# Altium PCB Coil_Driver_Rev_A.PcbDoc (part 2 of 2)
Units mm, origin at the board's own origin, x right, y up, seen from the top; angles counter-clockwise.
Board outline 103.83 x 48.83 mm, 4 copper layers (Top Layer, GND, Power, Bottom Layer), stack 1.57 mm thick; 192 components, 105 nets, 467 pads, 152 vias.
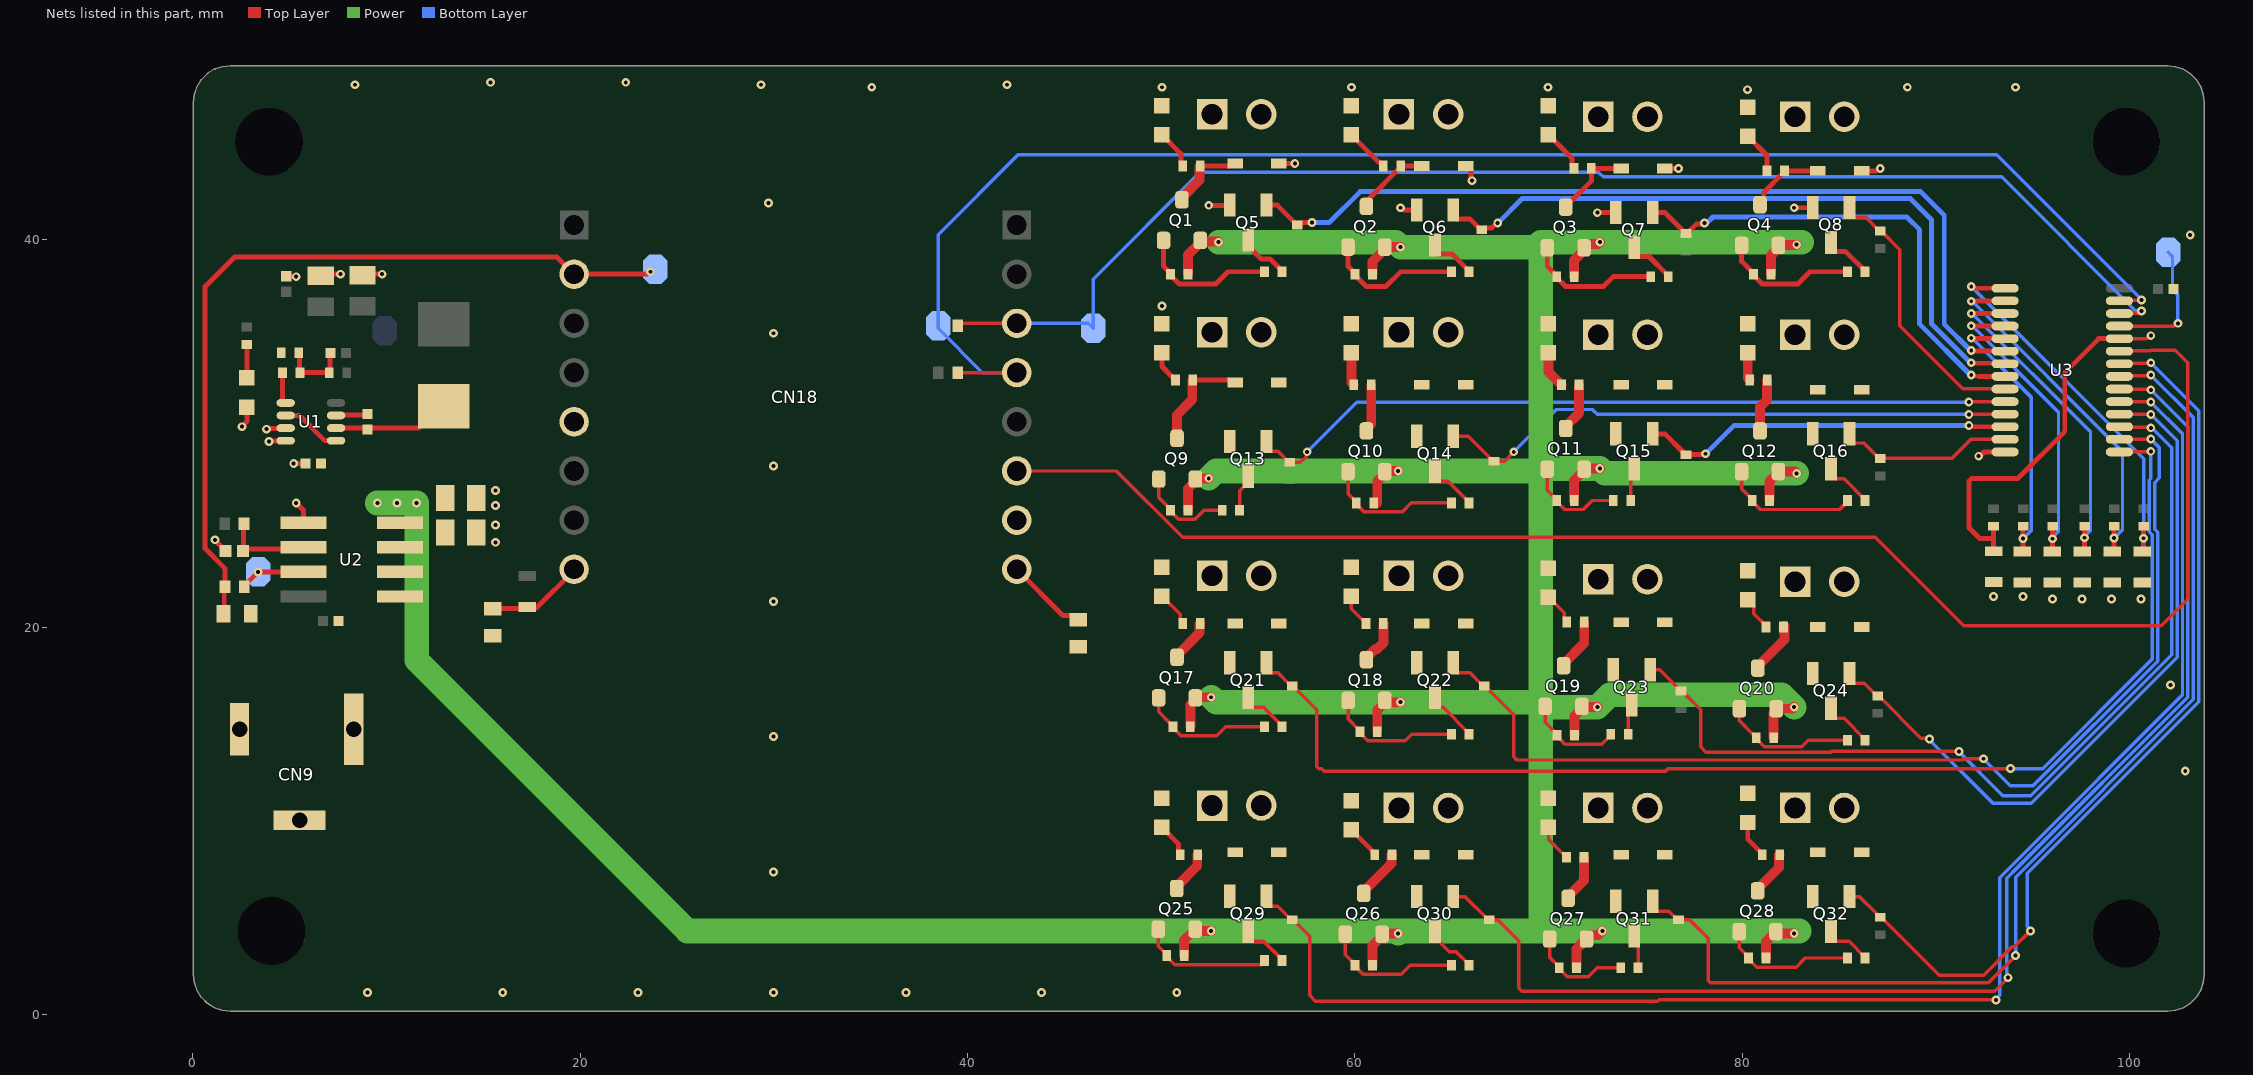
[diagram p4: the nets of this part, all layers, seen from the top]

## Via types
v1: diameter 0.45, hole 0.203, Top Layer to Bottom Layer, 91 vias
v2: diameter 0.457, hole 0.203, Top Layer to Bottom Layer, 60 vias
v3: diameter 0.457, hole 0.203, Top Layer to Bottom Layer, tented both sides, 1 vias

## Nets (pads, with @x,y where several pads share a name; then routed paths per layer and width w, separated by ;. In a path a pad name is that pad's centre, name@x,y a point inside that pad or via, vN(x,y) a via of type N, cw(c..) or ccw(c..) an arc to the next point about the centre after c; other vN are vias at no path point) (continued)
12V: C2.1 C3.1 C4.1 Q1.S Q2.S Q3.S Q4.S Q9.S Q10.S Q11.S Q12.S Q17.S Q18.S Q19.S Q20.S Q25.S Q26.S Q27.S Q28.S R1.1 R2.1 R3.1 R4.1 R17.1 R18.1 R19.1 R20.1 R37.1 R38.1 R39.1 R40.1 R53.1 R54.1 R55.1 R56.1 U1.2 U1.5 U2.3 U2.4 | length 259.5
  Top Layer w0.254: U1.2@4.796,30.932 5.517,30.932 6.812,29.637 7.391,29.637 U1.5@7.396,29.632
  Top Layer w0.508: R53.1@51.181,3.048 51.181,3.842 51.554,4.215 51.654,4.215 51.75,4.311 Q25.S@51.75,4.411 51.843,4.318 v1(52.578,4.318) ; R17.1@51.377,26.035 51.377,27.164 51.765,27.552 Q9.S@51.765,27.652 51.799,27.686 v1(52.451,27.686) ; R1.1@51.377,38.227 51.377,39.229 52.019,39.871 Q1.S@52.019,39.971 52.074,39.916 52.921,39.916 v1(52.959,39.878) ; R37.1@51.504,14.859 51.504,15.988 51.765,16.249 Q17.S@51.765,16.349 51.799,16.383 v1(52.578,16.383) ; R54.1@60.902,2.54 60.902,3.577 61.286,3.961 61.306,3.961 61.402,4.057 Q26.S@61.402,4.157 61.436,4.191 v1(62.23,4.191) ; R2.1@60.902,38.227 60.902,38.883 61.544,39.525 Q2.S@61.544,39.624 v1(62.357,39.624) ; R38.1@61.156,14.605 61.156,15.734 61.544,16.122 Q18.S@61.544,16.222 61.637,16.129 v1(62.357,16.129) ; R18.1@61.156,26.416 61.156,27.545 61.544,27.933 Q10.S@61.544,28.033 61.578,28.067 v1(62.23,28.067) ; R19.1@71.316,26.543 71.316,27.58 71.7,27.964 71.735,27.964 71.831,28.06 Q11.S@71.831,28.16 71.865,28.194 v1(72.644,28.194) ; R3.1@71.316,38.1 71.316,38.949 71.831,39.464 Q3.S@71.831,39.59 71.831,39.69 71.927,39.786 72.552,39.786 v1(72.644,39.878) ; R39.1@71.332,14.426 71.332,15.423 71.72,15.811 Q19.S@71.72,15.911 71.755,15.875 v1(72.517,15.875) ; R55.1@71.443,2.413 71.443,3.388 71.762,3.707 71.862,3.707 71.958,3.803 Q27.S@71.958,3.903 71.958,4.003 72.054,4.099 72.552,4.099 v1(72.771,4.318) ; R56.1@81.222,2.921 81.222,3.769 81.541,4.088 81.641,4.088 81.737,4.184 Q28.S@81.737,4.284 81.83,4.191 v1(82.677,4.191) ; R20.1@81.407,26.543 81.407,27.539 81.705,27.837 81.768,27.837 81.864,27.933 Q12.S@81.864,28.033 82.711,28.033 v1(82.804,27.94) ; R4.1@81.476,38.227 81.476,39.203 81.864,39.591 Q4.S@81.864,39.717 81.881,39.734 82.787,39.734 v1(82.804,39.751) ; R40.1@81.619,14.299 81.619,15.555 81.753,15.689 Q20.S@81.753,15.789 82.591,15.789 v1(82.677,15.875)
  Power w1.27: v2(9.525,26.416) v2(10.541,26.416) v2(11.557,26.416) 11.557,18.288 25.527,4.318 v1(52.578,4.318) v1@62.357,4.318 ; v1(52.451,27.686) 52.832,28.067 v1(62.23,28.067) 69.596,28.067 ; v1(52.578,16.383) 52.832,16.129 v1(62.357,16.129) 69.596,16.129 ; v1(52.959,39.878) 62.103,39.878 v1(62.357,39.624) 69.596,39.624 ; v1(62.23,4.191) v1@62.357,4.318 ; v1(82.677,15.875) 82.042,16.51 73.152,16.51 v1(72.517,15.875) 69.596,15.875 ; v1(82.804,27.94) 72.898,27.94 v1(72.644,28.194) 69.596,28.194 ; 82.931,4.318 v1(72.771,4.318) 69.469,4.318 ; 83.058,39.878 v1(72.644,39.878) 69.596,39.878 69.596,39.624 ; v1@62.357,4.318 69.469,4.318 ; 69.469,4.318 69.596,4.445 69.596,15.875 ; 69.596,15.875 69.596,16.129 ; 69.596,16.129 69.596,28.067 ; 69.596,28.067 69.596,28.194 ; 69.596,28.194 69.596,39.624
BTN_OLED: CN18.5
COIL1: Q5.1 R13.2 U3.6 | length 45.8
  Top Layer w0.254: Q5.1@55.433,41.794 55.996,41.794 56.875,40.915 R13.2@56.875,40.865 ; R13.2@57.023,40.767 57.121,40.865 57.291,40.865 57.32,40.894 v1(57.785,40.894) ; v1(91.821,34.29) 91.842,34.269 93.55,34.269 U3.6@93.57,34.249
  Bottom Layer w0.254: v1(57.785,40.894) 58.674,40.894 60.271,42.491 89.208,42.491 90.424,41.275 90.424,35.645 91.779,34.29 v1(91.821,34.29)
COIL2: Q6.1 R14.2 U3.7 | length 36.4
  Top Layer w0.254: Q6.1@65.085,41.54 65.085,41.24 65.258,41.067 65.955,41.067 66.498,40.524 R14.2@66.548,40.524 66.646,40.622 67.071,40.622 67.314,40.865 v1(67.367,40.865) ; v1(91.821,33.655) 91.849,33.627 93.542,33.627 U3.7@93.57,33.599
  Bottom Layer w0.254: v1(67.367,40.865) 68.637,42.135 88.675,42.135 89.768,41.042 89.768,35.666 91.779,33.655 v1(91.821,33.655)
COIL3: Q7.1 R15.2 U3.8 | length 25
  Top Layer w0.178: v1@91.903,32.949 92.202,32.949
  Top Layer w0.254: Q7.1@75.372,41.413 76.004,41.413 76.941,40.476 R15.2@76.941,40.426 ; R15.2@77.089,40.328 77.139,40.328 77.638,40.827 78.011,40.827 v1(78.048,40.865) ; 92.202,32.949 U3.8@93.57,32.949
  Bottom Layer w0.254: v1(78.048,40.865) 78.086,40.903 78.213,40.903 78.487,41.177 88.49,41.177 89.154,40.513 89.154,35.645 91.779,33.02 v1(91.821,33.02)
COIL4: Q8.1 R16.2 U3.9 | length 14.4
  Top Layer w0.178: Q8.1@85.532,41.667 85.532,41.367 85.743,41.156 86.371,41.156 87.072,40.455 R16.2@87.122,40.455 87.172,40.455 88.13,39.497 88.138,39.497 88.138,35.56 91.385,32.313 93.556,32.313 U3.9@93.57,32.299
COIL5: Q13.1 R29.2 U3.10 | length 40.2
  Top Layer w0.178: Q13.1@55.433,29.591 55.433,29.291 55.644,29.08 56.029,29.08 56.592,28.517 R29.2@56.642,28.517 57.184,28.517 57.479,28.812 57.479,29.002 v1(57.531,29.054) ; v1(91.694,31.623) 91.707,31.636 93.557,31.636 U3.10@93.57,31.649
  Bottom Layer w0.178: v1(57.531,29.054) 60.1,31.623 v1(91.694,31.623)
COIL6: Q14.1 R30.2 U3.11 | length 30.2
  Top Layer w0.178: Q14.1@65.085,29.856 65.852,29.856 67.133,28.575 R30.2@67.183,28.575 67.725,28.575 68.199,29.049 v1(68.199,29.054) ; v1(91.694,30.988) 91.699,30.993 93.564,30.993 U3.11@93.57,30.999
  Bottom Layer w0.178: v1(68.199,29.054) 70.387,31.242 72.263,31.242 72.517,30.988 v1(91.694,30.988)
COIL7: Q15.1 R31.2 U3.12 | length 19.1
  Top Layer w0.254: Q15.1@75.372,29.983 76.004,29.983 76.941,29.046 R31.2@76.941,28.996 ; R31.2@77.089,28.898 77.118,28.927 78.076,28.927 v1(78.105,28.956) ; v1(91.694,30.411) 91.747,30.411 91.809,30.349 U3.12@93.57,30.349
  Bottom Layer w0.254: v1(78.105,28.956) 79.56,30.411 v1(91.694,30.411)
COIL8: Q16.1 R32.2 U3.13 | length 9.2
  Top Layer w0.178: Q16.1@85.532,29.983 85.532,29.683 85.705,29.51 86.275,29.51 87.072,28.713 R32.2@87.122,28.713 90.816,28.713 91.821,29.718 91.83,29.709 93.561,29.709 U3.13@93.57,29.699
COIL9: Q21.1 R49.2 U3.15 | length 64.8
  Top Layer w0.178: Q21.1@55.433,18.172 55.433,17.872 55.644,17.661 56.018,17.661 56.719,16.96 R49.2@56.769,16.96 56.819,16.96 58.039,15.74 58.039,12.802 58.143,12.697 58.29,12.697 58.415,12.573 76.033,12.573 76.16,12.7 v2(93.853,12.7) ; U3.15@99.47,29.049 99.487,29.066 101.075,29.066 v1(101.092,29.083)
  Bottom Layer w0.178: v2(93.853,12.7) 95.504,12.7 101.163,18.359 101.163,24.778 101.007,24.934 101.007,27.584 101.092,27.67 v1(101.092,29.083)
COIL10: Q22.1 R50.2 U3.16 | length 56.6
  Top Layer w0.178: Q22.1@65.085,18.172 65.085,17.872 65.296,17.661 65.924,17.661 66.625,16.96 R50.2@66.675,16.96 66.725,16.96 68.199,15.486 68.199,13.312 68.367,13.144 91.37,13.144 91.434,13.208 v2(92.456,13.208) ; U3.16@99.47,29.699 99.48,29.709 101.083,29.709 v1(101.092,29.718)
  Bottom Layer w0.178: v2(92.456,13.208) 92.456,13.185 93.83,11.811 95.01,11.811 101.443,18.244 101.443,24.893 101.286,25.05 101.286,27.469 101.533,27.715 101.533,29.277 v1(101.092,29.718)
COIL11: Q23.1 R51.2 U3.17 | length 47.7
  Top Layer w0.178: Q23.1@75.245,17.802 75.739,17.802 76.649,16.892 76.649,16.842 76.785,16.706 R51.2@76.835,16.706 76.885,16.706 77.851,15.74 77.851,13.82 78.117,13.554 84.57,13.554 84.605,13.589 v2(91.186,13.589) ; U3.17@99.47,30.349 99.497,30.322 101.065,30.322 v1(101.092,30.295)
  Bottom Layer w0.178: v2(91.186,13.589) 91.186,13.566 93.449,11.303 94.897,11.303 102.168,18.574 102.168,29.266 101.139,30.295 v1(101.092,30.295)
COIL12: Q24.1 R52.2 U3.18 | length 37.7
  Top Layer w0.178: Q24.1@85.532,17.612 85.532,17.312 85.743,17.101 86.296,17.101 86.945,16.452 R52.2@86.995,16.452 87.045,16.452 89.22,14.277 89.609,14.277 v2(89.662,14.224) ; U3.18@99.47,30.999 99.476,30.993 101.087,30.993 v1(101.092,30.988)
  Bottom Layer w0.178: v2(89.662,14.224) 89.662,14.201 92.941,10.922 94.911,10.922 102.447,18.458 102.447,29.633 v1(101.092,30.988)
COIL13: Q29.1 R65.2 U3.19 | length 79.1
  Top Layer w0.178: Q29.1@55.433,6.107 55.433,5.807 55.644,5.596 56.018,5.596 56.719,4.895 R65.2@56.769,4.895 56.819,4.895 57.658,4.056 57.658,0.993 57.953,0.699 75.643,0.699 75.706,0.762 v2(93.091,0.762) ; U3.19@99.47,31.649 99.483,31.636 101.079,31.636 v1(101.092,31.623)
  Bottom Layer w0.178: v2(93.091,0.762) 93.091,0.815 93.281,1.006 93.281,7.063 94.036,7.818 102.727,16.508 102.727,29.988 v1(101.092,31.623)
COIL14: Q30.1 R66.2 U3.20 | length 69.1
  Top Layer w0.178: Q30.1@65.085,6.096 65.678,6.096 66.879,4.895 R66.2@66.929,4.895 67.368,4.895 68.453,3.81 68.453,1.374 68.621,1.206 93.027,1.206 v2(93.726,1.905) ; U3.20@99.47,32.299 99.491,32.279 101.071,32.279 v1(101.092,32.258)
  Bottom Layer w0.178: v2(93.726,1.905) 93.673,1.958 93.673,2.139 93.662,2.149 93.662,7.048 94.234,7.62 103.006,16.392 103.006,30.344 v1(101.092,32.258)
COIL15: Q31.1 R67.2 U3.21 | length 58.8
  Top Layer w0.178: Q31.1@75.372,5.853 75.372,5.553 75.583,5.342 76.211,5.342 76.658,4.895 R67.2@76.708,4.895 77.274,4.895 78.232,3.937 78.232,1.755 78.336,1.651 92.71,1.651 v2(94.107,3.048) ; U3.21@99.47,32.949 99.506,32.984 101.056,32.984 v1(101.092,33.02)
  Bottom Layer w0.178: v2(94.107,3.048) 94.107,7.098 103.286,16.276 103.286,30.826 v1(101.092,33.02)
COIL16: Q32.1 R68.2 U3.22 | length 47.7
  Top Layer w0.178: Q32.1@85.532,6.096 86.048,6.096 86.936,5.208 86.936,5.158 87.072,5.022 R68.2@87.122,5.022 87.172,5.022 90.162,2.032 92.462,2.032 93.923,3.492 94.051,3.492 v2(94.876,4.318) ; U3.22@99.47,33.599 99.498,33.627 101.064,33.627 v1(101.092,33.655)
  Bottom Layer w0.178: v2(94.876,4.318) 94.876,4.394 94.711,4.559 94.711,7.307 103.565,16.161 103.565,31.182 v1(101.092,33.655)
Coil_EN: CN18.11 U3.23 | length 80.4
  Top Layer w0.178: CN18.11@42.545,28.067 47.676,28.067 51.105,24.638 86.868,24.638 91.44,20.066 101.623,20.066 102.997,21.44 102.997,33.655 102.362,34.29 101.092,34.29 101.071,34.269 99.491,34.269 U3.23@99.47,34.249
CUR_SYS_ANA: C14.1 CN18.2 R72.1 TP2.1 | length 41.4
  Top Layer w0.254: C14.1@1.623,20.665 1.623,22.062 R72.1@1.659,22.098 1.659,23.038 0.635,24.062 0.635,37.592 2.159,39.116 18.796,39.116 CN18.2@19.685,38.227 23.442,38.227 23.569,38.354 v1(23.622,38.354)
GND: C2.2 C3.2 C4.2 C6.2 C7.2 C10.2 C11.2 C12.2 C13.2 C14.2 C15.2 C16.2 CN1.2 CN2.2 CN3.2 CN4.2 CN5.2 CN6.2 CN7.2 CN8.2 CN9.2 CN9.3 CN10.2 CN11.2 CN12.2 CN13.2 CN14.2 CN15.2 CN16.2 CN17.2 CN18.10 D1.2 D2.2 D3.2 D4.2 D5.2 D6.2 D7.2 D8.2 D9.2 D10.2 D11.2 D12.2 D13.2 D14.2 D15.2 D16.2 J1.1 J2.1 J3.1 J4.1 J5.1 J6.1 LED1.2 LED2.2 LED3.2 LED4.2 LED5.2 LED6.2 LED7.2 LED8.2 LED9.2 LED10.2 LED11.2 LED12.2 LED13.2 LED14.2 LED15.2 LED16.2 LED17.2 Q5.2 Q6.2 Q7.2 Q8.2 Q13.2 Q14.2 Q15.2 Q16.2 Q21.2 Q22.2 Q23.2 Q24.2 Q29.2 Q30.2 Q31.2 Q32.2 R36.2 U1.3 U1.4 U2.5 U3.14 | length 17.1
  Top Layer w0.254: v1(1.143,24.511) 1.143,24.497 C13.2@1.693,23.947 ; v1(2.54,30.353) 2.794,30.607 LED9.2@2.794,31.369 ; v1(3.81,30.226) 3.838,30.254 4.768,30.254 U1.3@4.796,30.282 ; v1(3.937,29.591) 3.958,29.612 4.775,29.612 U1.4@4.796,29.632 ; C10.2@4.826,38.119 4.836,38.109 5.325,38.109 v1(5.334,38.1) ; v1(5.207,28.448) C4.2@5.823,28.448 ; v1(5.334,26.416) 5.715,26.035 U2.5@5.715,25.4 ; C6.2@6.604,38.138 6.693,38.227 v1(7.62,38.227) ; C7.2@8.763,38.176 8.814,38.227 v1(9.779,38.227) ; v1(52.451,41.783) 53.522,41.783 Q5.2@53.533,41.794 ; D1.2@56.058,43.942 v1(56.896,43.942) ; v1(62.357,41.656) 62.41,41.656 62.526,41.54 Q6.2@63.185,41.54 ; D2.2@65.71,43.815 65.86,43.815 65.983,43.692 65.983,43.163 66.04,43.106 v1(66.04,43.053) ; v1(72.517,41.402) 73.461,41.402 Q7.2@73.472,41.413 ; D3.2@75.997,43.688 v1(76.708,43.688) ; v1(82.677,41.656) 83.621,41.656 Q8.2@83.632,41.667 ; D4.2@86.157,43.561 86.942,43.561 87.069,43.688 v1(87.122,43.688) ; v1(92.202,28.829) 92.255,28.829 92.475,29.049 U3.14@93.57,29.049
  other v2: 9.017,1.143 16.002,1.143 22.987,1.143 29.972,1.143 36.83,1.143 43.815,1.143 50.8,1.143 102.87,12.573 29.972,14.351 102.108,17.018 29.972,21.336 96.012,21.463 97.536,21.463 99.06,21.463 100.584,21.463 92.964,21.59 94.488,21.59 15.621,24.384 15.621,25.273 15.621,26.289 15.621,27.051 29.972,28.321 29.972,35.179 50.038,36.576 103.124,40.259 29.718,41.91 80.264,47.752 35.052,47.879 50.038,47.879 59.817,47.879 69.977,47.879 88.519,47.879 94.107,47.879 8.382,48.006 29.337,48.006 42.037,48.006 15.367,48.133 22.352,48.133
  other v3: 29.972,7.366
NetC1_1: C1.1 U1.7 | length 1.7
  Top Layer w0.254: U1.7@7.396,30.932 7.424,30.96 8.97,30.96 C1.1@9.017,31.007
NetC1_2: C1.2 L1.1 U1.6 | length 6
  Top Layer w0.254: U1.6@7.396,30.282 9.017,30.282 11.658,30.282 12.779,31.403 L1.1@12.954,31.403
NetC5_2: C5.2 R33.2 R34.2 R36.1 | length 3.6
  Top Layer w0.254: R36.1@5.472,34.163 5.501,34.134 5.501,33.176 R34.2@5.53,33.147 R33.2@7.043,33.147 7.077,33.182 7.077,34.128 C5.2@7.112,34.163
NetC11_1: C11.1 CN18.8 J7.2 | length 5.1
  Top Layer w0.254: C11.1@15.494,20.958 15.509,20.973 17.511,20.973 17.526,20.987 17.722,20.987 19.685,22.95 CN18.8@19.685,22.987
NetC13_1: C13.1 R71.2 U2.6 | length 4.6
  Top Layer w0.254: C13.1@2.593,23.947 C13.1@2.618,23.972 ; R71.2@2.643,25.344 2.618,25.319 C13.1@2.618,23.972 ; U2.6@5.715,24.13 5.624,24.039 2.685,24.039 C13.1@2.618,23.972
NetCN1_1: CN1.1 D1.1 Q1.D R9.1 | length 4
  Top Layer w0.254: R9.1@52.012,43.815 53.531,43.815 53.658,43.942 D1.1@53.808,43.942
  Top Layer w0.508: Q1.D@51.069,42.071 51.069,42.171 51.983,43.085 51.983,43.794 52.004,43.815 R9.1@52.012,43.815
NetCN2_1: CN2.1 D2.1 Q2.D R10.1 | length 3.9
  Top Layer w0.254: Q2.D@60.594,41.724 60.787,41.917 60.787,42.189 62.363,43.765 R10.1@62.363,43.815 D2.1@63.46,43.815
NetCN3_1: CN3.1 D3.1 Q3.D R11.1 | length 4.1
  Top Layer w0.254: Q3.D@70.881,41.69 70.881,41.764 71.1,41.983 71.156,41.983 72.205,43.032 R11.1@72.205,43.688 D3.1@73.747,43.688
NetCN4_1: CN4.1 D4.1 Q4.D R12.1 | length 4
  Top Layer w0.254: Q4.D@80.914,41.817 81.107,42.01 81.107,42.443 82.175,43.511 R12.1@82.175,43.561 D4.1@83.907,43.561
NetCN5_1: CN5.1 D5.1 Q9.D R25.1 | length 5.6
  Top Layer w0.254: R25.1@51.631,32.766 53.531,32.766 53.658,32.639 D5.1@53.808,32.639
  Top Layer w0.508: Q9.D@50.815,29.752 50.815,30.964 51.602,31.751 51.602,32.745 51.623,32.766 R25.1@51.631,32.766
NetCN6_1: CN6.1 D6.1 Q10.D R26.1 | length 2.5
  Top Layer w0.508: Q10.D@60.594,30.133 60.594,30.233 60.839,30.478 R26.1@60.839,32.512
NetCN7_1: CN7.1 D7.1 Q11.D R27.1 | length 2.5
  Top Layer w0.508: Q11.D@70.881,30.26 70.881,30.36 71.57,31.049 R27.1@71.57,32.512
NetCN8_1: CN8.1 D8.1 Q12.D R28.1 | length 2.8
  Top Layer w0.508: Q12.D@80.914,30.133 80.914,31.366 81.277,31.729 81.277,32.757 R28.1@81.286,32.766
NetCN9_1: CN9.1 U2.1 U2.2
NetCN10_1: CN10.1 D9.1 Q17.D R45.1 | length 2.2
  Top Layer w0.508: Q17.D@50.815,18.449 50.815,18.549 51.983,19.717 51.983,20.172 52.004,20.193 R45.1@52.012,20.193
NetCN11_1: CN11.1 D10.1 Q18.D R46.1 | length 2.3
  Top Layer w0.508: Q18.D@60.594,18.322 60.594,18.422 61.049,18.877 61.149,18.877 61.468,19.196 R46.1@61.468,20.193
NetCN12_1: CN12.1 D11.1 Q19.D R47.1 | length 2.7
  Top Layer w0.508: Q19.D@70.77,18.011 70.77,18.111 71.84,19.181 R47.1@71.84,20.268
NetCN13_1: CN13.1 D12.1 Q20.D R48.1 | length 2.8
  Top Layer w0.508: Q20.D@80.803,17.889 80.803,17.989 82.178,19.364 82.178,20.065 R48.1@82.127,20.014
NetCN14_1: CN14.1 D13.1 Q25.D R61.1 | length 2.2
  Top Layer w0.508: Q25.D@50.8,6.511 50.8,6.611 51.856,7.667 51.856,8.234 51.877,8.255 R61.1@51.885,8.255
NetCN15_1: CN15.1 D14.1 Q26.D R62.1 | length 2.6
  Top Layer w0.508: Q26.D@60.452,6.257 60.452,6.357 61.889,7.794 61.889,8.234 61.91,8.255 R62.1@61.918,8.255
NetCN16_1: CN16.1 D15.1 Q27.D R63.1 | length 2.5
  Top Layer w0.508: Q27.D@71.008,6.003 71.008,6.103 71.824,6.919 R63.1@71.824,8.128
NetCN17_1: CN17.1 D16.1 Q28.D R64.1 | length 2.3
  Top Layer w0.508: Q28.D@80.787,6.384 80.787,6.484 81.897,7.594 81.897,8.234 81.918,8.255 R64.1@81.926,8.255
NetJ1_2: J1.2 R73.2 U3.24 | length 19.5
  Top Layer w0.178: U3.24@99.47,34.899 100.865,34.899 101.018,35.052 v1(101.092,35.052)
  Top Layer w0.254: J1.2@92.972,23.923 92.972,24.571 ; R73.2@92.972,25.219 92.972,24.571 ; U3.24@99.47,34.899 98.399,34.899 96.647,33.147 96.647,30.099 94.234,27.686 91.843,27.686 91.694,27.537 91.694,25.146 92.269,24.571 92.972,24.571
NetJ2_2: J2.2 R74.2 U3.5 | length 14.9
  Top Layer w0.254: v1(91.821,34.925) 91.834,34.912 93.557,34.912 U3.5@93.57,34.899 ; J2.2@94.463,23.908 94.496,23.941 v2(94.496,24.58) R74.2@94.496,25.219
  Bottom Layer w0.178: v1(91.821,34.925) 91.863,34.925 94.929,31.86 94.929,25.013 v2(94.496,24.58)
NetJ3_2: J3.2 R75.2 U3.4 | length 16.1
  Top Layer w0.254: v1(91.821,35.56) 91.827,35.554 93.565,35.554 U3.4@93.57,35.549 ; J3.2@96.012,23.908 96.02,23.916 v2(96.02,24.567) R75.2@96.02,25.219
  Bottom Layer w0.178: v1(91.821,35.56) 91.863,35.56 96.326,31.098 96.326,24.949 96.02,24.643 v2(96.02,24.567)
NetJ4_2: J4.2 R76.2 U3.3 | length 17.4
  Top Layer w0.254: v1(91.821,36.195) 91.823,36.197 93.568,36.197 U3.3@93.57,36.199 ; J4.2@97.561,23.908 97.671,24.018 v2(97.671,24.618) R76.2@97.671,25.219
  Bottom Layer w0.178: v1(91.821,36.195) 91.863,36.195 97.977,30.082 97.977,25 97.671,24.694 v2(97.671,24.618)
NetJ5_2: J5.2 R77.2 U3.2 | length 18.8
  Top Layer w0.254: v1(91.821,36.83) 91.83,36.839 93.561,36.839 U3.2@93.57,36.849 ; J5.2@99.11,23.908 99.195,23.993 v2(99.195,24.606) R77.2@99.195,25.219
  Bottom Layer w0.178: v1(91.821,36.83) 91.863,36.83 99.628,29.066 99.628,25.039 v2(99.195,24.606)
NetJ6_2: J6.2 R78.2 U3.1 | length 19.8
  Top Layer w0.254: v1(91.821,37.592) 91.874,37.592 91.967,37.499 U3.1@93.57,37.499 ; J6.2@100.659,23.908 100.719,23.968 v2(100.719,24.594) R78.2@100.719,25.219
  Bottom Layer w0.178: v1(91.821,37.592) 100.719,28.694 v2(100.719,24.594)
NetLED1_1: LED1.1 R9.2 | length 2.1
  Top Layer w0.254: LED1.1@50.038,45.426 51.014,44.45 51.014,43.913 R9.2@51.112,43.815
NetLED2_1: LED2.1 R10.2 | length 2.3
  Top Layer w0.254: LED2.1@59.817,45.426 61.28,43.963 61.365,43.963 61.463,43.865 R10.2@61.463,43.815
NetLED3_1: LED3.1 R11.2 | length 2.3
  Top Layer w0.254: LED3.1@69.993,45.426 71.207,44.212 71.207,43.786 R11.2@71.305,43.688
NetLED4_1: LED4.1 R12.2 | length 2.2
  Top Layer w0.254: LED4.1@80.28,45.351 81.275,44.356 R12.2@81.275,43.561
NetLED5_1: LED5.1 R25.2 | length 1.7
  Top Layer w0.254: LED5.1@50.038,34.175 50.038,33.459 50.583,32.914 50.633,32.914 50.731,32.816 R25.2@50.731,32.766
NetLED6_1: LED6.1 R26.2 | length 1.7
  Top Layer w0.508: LED6.1@59.817,34.175 59.817,32.626 59.931,32.512 R26.2@59.939,32.512
NetLED7_1: LED7.1 R27.2 | length 1.9
  Top Layer w0.508: LED7.1@69.993,34.175 69.993,33.181 70.662,32.512 R27.2@70.67,32.512
NetLED8_1: LED8.1 R28.2 | length 1.5
  Top Layer w0.508: LED8.1@80.28,34.175 80.28,32.864 80.378,32.766 R28.2@80.386,32.766
NetLED9_1: LED9.1 R35.2 | length 1.7
  Top Layer w0.254: LED9.1@2.794,32.869 R35.2@2.794,34.602
NetLED10_1: LED10.1 R45.2 | length 1.9
  Top Layer w0.178: LED10.1@50.038,21.602 50.976,20.664 50.976,20.329 R45.2@51.112,20.193
NetLED11_1: LED11.1 R46.2 | length 1.7
  Top Layer w0.178: LED11.1@59.817,21.602 59.817,20.944 60.382,20.379 60.432,20.379 60.568,20.243 R46.2@60.568,20.193
NetLED12_1: LED12.1 R47.2 | length 1.7
  Top Layer w0.178: LED12.1@69.993,21.55 70.804,20.739 70.804,20.404 R47.2@70.94,20.268
NetLED13_1: LED13.1 R48.2 | length 1.8
  Top Layer w0.178: LED13.1@80.28,21.423 80.591,21.112 80.591,20.7 81.227,20.064 R48.2@81.227,20.014
NetLED14_1: LED14.1 R61.2 | length 1.8
  Top Layer w0.254: LED14.1@50.038,9.664 50.887,8.815 50.887,8.353 R61.2@50.985,8.255
NetLED15_1: LED15.1 R62.2 | length 1.8
  Top Layer w0.254: LED15.1@59.817,9.537 60.92,8.434 60.92,8.353 R62.2@61.018,8.255
NetLED16_1: LED16.1 R63.2 | length 2
  Top Layer w0.178: LED16.1@69.993,9.664 69.993,9.059 70.738,8.314 70.788,8.314 70.924,8.178 R63.2@70.924,8.128
NetLED17_1: LED17.1 R64.2 | length 2
  Top Layer w0.254: LED17.1@80.28,9.918 80.28,9.051 81.026,8.305 R64.2@81.026,8.255
NetQ1_G: Q1.G R1.2 R5.1 | length 7.2
  Top Layer w0.254: Q1.G@50.119,39.971 50.119,38.635 50.477,38.277 R1.2@50.477,38.227 50.477,38.177 50.931,37.723 52.817,37.723 53.448,38.354 R5.1@55.333,38.354
NetQ2_G: Q2.G R2.2 R6.1 | length 7.1
  Top Layer w0.254: Q2.G@59.644,39.624 59.644,38.635 60.002,38.277 R2.2@60.002,38.227 60.002,38.177 60.587,37.592 61.595,37.592 62.357,38.354 R6.1@64.985,38.354
NetQ3_G: Q3.G R3.2 R7.1 | length 7
  Top Layer w0.254: Q3.G@69.931,39.59 69.931,38.635 70.416,38.15 R3.2@70.416,38.1 70.416,38.05 70.87,37.596 72.833,37.596 73.337,38.1 R7.1@75.272,38.1
NetQ4_G: Q4.G R4.2 R8.1 | length 6.9
  Top Layer w0.254: Q4.G@79.964,39.717 79.964,38.886 R4.2@80.475,38.375 ; R4.2@80.576,38.227 80.576,38.177 81.03,37.723 82.867,37.723 83.497,38.354 R8.1@85.432,38.354
NetQ5_3: Q5.3 R5.2 | length 2.6
  Top Layer w0.254: Q5.3@54.483,39.994 54.483,39.694 55.166,39.011 55.626,39.011 56.233,38.404 R5.2@56.233,38.354
NetQ6_3: Q6.3 R6.2 | length 2.5
  Top Layer w0.254: Q6.3@64.135,39.74 64.135,39.44 64.308,39.267 65.022,39.267 65.885,38.404 R6.2@65.885,38.354
NetQ7_3: Q7.3 R7.2 | length 2.6
  Top Layer w0.254: Q7.3@74.422,39.613 74.422,39.313 74.595,39.14 75.182,39.14 76.172,38.15 R7.2@76.172,38.1
NetQ8_3: Q8.3 R8.2 | length 2.6
  Top Layer w0.254: Q8.3@84.582,39.867 84.582,39.567 84.755,39.394 85.342,39.394 86.332,38.404 R8.2@86.332,38.354
NetQ9_G: Q9.G R17.2 R21.1 | length 5
  Top Layer w0.178: Q9.G@49.865,27.652 49.865,26.697 50.477,26.085 R17.2@50.477,26.035 50.477,25.985 50.892,25.569 51.742,25.569 52.208,26.035 R21.1@53.144,26.035
NetQ10_G: Q10.G R18.2 R22.1 | length 7.1
  Top Layer w0.178: Q10.G@59.644,28.033 59.644,26.893 60.071,26.466 R18.2@60.071,26.416 60.071,26.366 60.487,25.95 62.435,25.95 62.9,26.416 R22.1@64.985,26.416
NetQ11_G: Q11.G R19.2 R23.1 | length 5.2
  Top Layer w0.178: Q11.G@69.931,28.16 69.931,27.078 70.416,26.593 R19.2@70.416,26.543 70.416,26.493 70.831,26.077 71.783,26.077 72.249,26.543 R23.1@73.337,26.543
NetQ12_G: Q12.G R20.2 R24.1 | length 7.1
  Top Layer w0.178: Q12.G@79.964,28.033 79.964,27.136 80.507,26.593 R20.2@80.507,26.543 80.507,26.493 80.923,26.077 85.017,26.077 85.432,26.493 R24.1@85.432,26.543
NetQ13_3: Q13.3 R21.2 | length 1.9
  Top Layer w0.178: R21.2@54.044,26.035 54.044,27.052 54.483,27.491 Q13.3@54.483,27.791
NetQ14_3: Q14.3 R22.2 | length 2.6
  Top Layer w0.178: Q14.3@64.135,28.056 64.135,27.756 64.346,27.545 64.806,27.545 65.885,26.466 R22.2@65.885,26.416
NetQ15_3: Q15.3 R23.2 | length 1.7
  Top Layer w0.178: R23.2@74.237,26.543 74.237,27.998 Q15.3@74.422,28.183
NetQ16_3: Q16.3 R24.2 | length 2.6
  Top Layer w0.178: Q16.3@84.582,28.183 84.582,27.883 84.793,27.672 85.253,27.672 86.332,26.593 R24.2@86.332,26.543
NetQ17_G: Q17.G R37.2 R41.1 | length 6.9
  Top Layer w0.178: Q17.G@49.865,16.349 49.865,15.632 50.452,15.045 50.468,15.045 50.604,14.909 R37.2@50.604,14.859 50.604,14.809 51.019,14.393 52.875,14.393 53.341,14.859 R41.1@55.333,14.859
NetQ18_G: Q18.G R38.2 R42.1 | length 7
  Top Layer w0.178: Q18.G@59.644,16.222 59.644,15.267 60.256,14.655 R38.2@60.256,14.605 60.256,14.555 60.671,14.139 62.591,14.139 62.929,14.478 R42.1@64.985,14.478
NetQ19_G: Q19.G R39.2 R43.1 | length 5
  Top Layer w0.178: Q19.G@69.82,15.911 69.82,15.088 70.432,14.476 R39.2@70.432,14.426 70.432,14.376 70.847,13.96 72.742,13.96 73.21,14.428 R43.1@73.21,14.478
NetQ20_G: Q20.G R40.2 R44.1 | length 7
  Top Layer w0.178: Q20.G@79.853,15.789 79.853,15.165 80.533,14.485 80.583,14.485 80.719,14.349 R40.2@80.719,14.299 80.719,14.249 81.134,13.833 83.071,13.833 83.409,14.172 R44.1@85.432,14.172
NetQ21_3: Q21.3 R41.2 | length 2.6
  Top Layer w0.178: Q21.3@54.483,16.372 54.483,16.072 54.694,15.861 55.281,15.861 56.233,14.909 R41.2@56.233,14.859
NetQ22_3: Q22.3 R42.2 | length 2.7
  Top Layer w0.178: Q22.3@64.135,16.372 64.135,16.072 64.346,15.861 64.552,15.861 65.885,14.528 R42.2@65.885,14.478
NetQ23_3: Q23.3 R43.2 | length 1.6
  Top Layer w0.178: R43.2@74.11,14.478 74.11,15.817 Q23.3@74.295,16.002
NetQ24_3: Q24.3 R44.2 | length 2.6
  Top Layer w0.178: Q24.3@84.582,15.812 84.582,15.512 84.793,15.301 85.253,15.301 86.332,14.222 R44.2@86.332,14.172
NetQ25_G: Q25.G R53.2 R57.1 | length 6.9
  Top Layer w0.178: Q25.G@49.85,4.411 49.85,3.529 50.281,3.098 R53.2@50.281,3.048 50.281,2.998 50.697,2.582 55.172,2.582 55.333,2.744 R57.1@55.333,2.794
NetQ26_G: Q26.G R54.2 R58.1 | length 7.2
  Top Layer w0.178: Q26.G@59.502,4.157 59.502,3.09 60.002,2.59 R54.2@60.002,2.54 60.002,2.49 60.417,2.074 62.4,2.074 62.866,2.54 R58.1@64.985,2.54
NetQ27_G: Q27.G R55.2 R59.1 | length 5.3
  Top Layer w0.178: Q27.G@70.058,3.903 70.058,2.948 70.543,2.463 R55.2@70.543,2.413 70.543,2.363 70.958,1.947 72.037,1.947 72.503,2.413 R59.1@73.718,2.413
NetQ28_G: Q28.G R56.2 R60.1 | length 7.1
  Top Layer w0.178: Q28.G@79.837,4.284 79.837,3.456 80.322,2.971 R56.2@80.322,2.921 80.322,2.871 80.737,2.455 82.784,2.455 83.249,2.921 R60.1@85.432,2.921
NetQ29_3: Q29.3 R57.2 | length 2.6
  Top Layer w0.178: Q29.3@54.483,4.307 54.483,4.007 54.694,3.796 55.281,3.796 56.233,2.844 R57.2@56.233,2.794
NetQ30_3: Q30.3 R58.2 | length 2.7
  Top Layer w0.178: Q30.3@64.135,4.296 64.135,3.996 64.875,3.256 65.22,3.256 65.885,2.59 R58.2@65.885,2.54
NetQ31_3: Q31.3 R59.2 | length 1.7
  Top Layer w0.178: Q31.3@74.422,4.053 74.618,3.857 R59.2@74.618,2.413
NetQ32_3: Q32.3 R60.2 | length 2.5
  Top Layer w0.178: Q32.3@84.582,4.296 84.582,3.996 84.793,3.785 85.518,3.785 86.332,2.971 R60.2@86.332,2.921
NetR34_1: R34.1 U1.1 | length 1.7
  Top Layer w0.254: R34.1@4.63,33.147 4.63,31.649 4.697,31.582 U1.1@4.796,31.582
NetR72_2: R72.2 TP5.1 U2.7 | length 3.4
  Top Layer w0.254: R72.2@2.659,22.098 2.659,22.148 v2(3.371,22.86) U2.7@5.715,22.86
NetTP6_1: TP6.1 U3.25 | length 7
  Top Layer w0.178: U3.25@99.47,35.549 102.277,35.549 102.415,35.687 v1(102.489,35.687)
  Bottom Layer w0.178: TP6.1@101.981,39.37 102.21,39.141 102.21,37.421 102.489,37.141 v1(102.489,35.687)
SCL: CN18.14 R69.1 TP3.1 U3.26 | length 70.1
  Top Layer w0.178: R69.1@39.489,35.56 39.616,35.687 CN18.14@42.545,35.687 ; U3.26@99.47,36.199 99.49,36.219 v1@100.437,36.219
  Bottom Layer w0.178: CN18.14@42.545,35.687 46.228,35.687 TP3.1@46.482,35.433 46.482,37.973 52.003,43.494 72.572,43.494 72.819,43.247 93.387,43.247 100.293,36.342 100.593,36.342 v1(100.613,36.322)
SDA: CN18.13 R70.1 TP4.1 U3.27 | length 81
  Top Layer w0.178: R70.1@39.489,33.147 CN18.13@42.545,33.147 ; U3.27@99.47,36.849 99.495,36.874 100.588,36.874 v1(100.613,36.899)
  Bottom Layer w0.178: CN18.13@42.545,33.147 40.767,33.147 38.481,35.433 TP4.1@38.481,35.56 38.481,40.259 42.605,44.383 93.129,44.383 v1(100.613,36.899)
VUSB: C12.1 CN18.9 | length 4.3
  Top Layer w0.254: CN18.9@42.545,22.987 44.924,20.608 45.497,20.608 C12.1@45.72,20.385
pads on no net: CN18.1 CN18.3 CN18.4 CN18.6 CN18.7 CN18.12 CN18.15 CN18.16 U1.8

## Polygon pours and split planes (outlines as drawn)
GND on Top Layer "GND_L01_P023" (solid, pour order 23): -0.508,49.657 0.127,49.022 104.394,49.022 104.394,-0.762 104.14,-1.016 103.759,-0.635 0.127,-0.635
NetCN14_1 on Top Layer "NETCN14_1_L01_P021" (solid, pour order 21): 53.848,12.167 53.975,12.04 53.975,7.722 52.07,7.722 51.435,8.357 51.435,12.167
NetCN15_1 on Top Layer "NETCN15_1_L01_P020" (solid, pour order 20): 63.5,12.167 63.627,12.04 63.627,7.722 61.722,7.722 61.087,8.357 61.087,12.167
NetCN16_1 on Top Layer "NETCN16_1_L01_P019" (solid, pour order 19): 73.787,12.04 73.914,11.913 73.914,7.595 72.009,7.595 71.374,8.23 71.374,12.04
NetCN17_1 on Top Layer "NETCN17_1_L01_P018" (solid, pour order 18): 83.896,11.989 84.023,11.862 84.023,7.544 82.118,7.544 81.483,8.179 81.483,11.989
NetCN10_1 on Top Layer "NETCN10_1_L01_P017" (solid, pour order 17): 53.848,23.851 53.975,23.724 53.975,19.406 52.07,19.406 51.435,20.041 51.435,23.851
NetCN11_1 on Top Layer "NETCN11_1_L01_P016" (solid, pour order 16): 63.5,23.851 63.627,23.724 63.627,19.406 61.722,19.406 61.087,20.041 61.087,23.851
NetCN12_1 on Top Layer "NETCN12_1_L01_P015" (solid, pour order 15): 73.787,23.724 73.914,23.597 73.914,19.279 72.009,19.279 71.374,19.914 71.374,23.724
NetCN13_1 on Top Layer "NETCN13_1_L01_P014" (solid, pour order 14): 83.896,23.673 84.023,23.546 84.023,19.228 82.118,19.228 81.483,19.863 81.483,23.673
NetCN5_1 on Top Layer "NETCN5_1_L01_P013" (solid, pour order 13): 53.848,36.603 53.975,36.476 53.975,32.158 51.181,32.158 51.181,36.603
NetCN6_1 on Top Layer "NETCN6_1_L01_P012" (solid, pour order 12): 63.5,36.603 63.627,36.476 63.627,32.158 60.452,32.158 60.452,36.603
NetCN7_1 on Top Layer "NETCN7_1_L01_P011" (solid, pour order 11): 73.787,36.476 73.914,36.349 73.914,32.031 71.12,32.031 71.12,36.476
NetCN8_1 on Top Layer "NETCN8_1_L01_P010" (solid, pour order 10): 83.896,36.425 84.023,36.298 84.023,31.98 81.541,31.98 81.026,32.495 81.026,36.425
NetCN1_1 on Top Layer "NETCN1_1_L01_P009" (solid, pour order 9): 53.899,47.803 54.026,47.676 54.026,43.358 52.121,43.358 51.486,43.993 51.486,47.803
NetCN2_1 on Top Layer "NETCN2_1_L01_P008" (solid, pour order 8): 63.551,47.803 63.678,47.676 63.678,43.358 61.773,43.358 61.138,43.993 61.138,47.803
NetCN3_1 on Top Layer "NETCN3_1_L01_P007" (solid, pour order 7): 73.838,47.676 73.965,47.549 73.965,43.231 72.06,43.231 71.425,43.866 71.425,47.676
NetCN4_1 on Top Layer "NETCN4_1_L01_P006" (solid, pour order 6): 83.947,47.625 84.074,47.498 84.074,43.18 81.153,43.18 81.153,47.625
3.3V on Top Layer "3.3V_L01_P005" (solid, pour order 5): 11.557,34.036 14.732,34.036 14.732,37.211 14.351,37.592 3.302,37.592 3.302,35.814 4.318,34.798 10.795,34.798
NetC1_2 on Top Layer "NETC1_2_L01_P004" (solid, pour order 4): 14.478,32.639 14.351,32.512 14.351,30.099 9.71,30.099 9.527,30.282 11.43,32.766
12V on Top Layer "12V_L01_P003" (solid, pour order 3): 13.97,23.495 13.97,29.845 13.843,29.972 6.477,29.972 6.477,28.956 6.223,28.702 6.223,27.559 8.636,25.146 8.636,23.495
NetCN9_1 on Top Layer "NETCN9_1_L01_P002" (solid, pour order 2): 5.715,16.256 6.096,15.875 6.096,11.43 11.811,11.43 13.97,13.589 13.97,23.495 9.017,23.495 8.763,23.241 8.763,18.034 5.969,18.034 5.715,18.034
GND on GND "GND_L02_P000" (solid, pour order 0): -0.635,50.165 0,49.53 104.267,49.53 104.267,-0.254 104.013,-0.508 103.632,-0.127 0,-0.127
GND on Bottom Layer "GND_L04_P022" (solid, pour order 22): -0.381,50.038 0.254,49.403 104.521,49.403 104.521,-0.381 104.267,-0.635 103.886,-0.254 0.254,-0.254
3.3V on Power "3.3V_L03_P001" (solid, pour order 1): -0.889,49.657 -0.254,49.022 104.013,49.022 104.013,-0.762 103.759,-1.016 103.378,-0.635 -0.254,-0.635

## Keep-outs
Keep-Out Layer:
  circle w0.051: c99.822,4.191 r3.845
  circle w0.051: c4.064,4.318 r3.845
  circle w0.051: c3.937,45.085 r3.845
  circle w0.051: c99.822,45.085 r3.845
  lines w0.127: 0.026,2.081 0.075,1.651 0.216,1.247 0.444,0.885 0.746,0.583 1.108,0.355 1.512,0.214 1.942,0.165 101.942,0.165 102.372,0.214 102.776,0.355 103.138,0.583 103.44,0.885 103.668,1.247 103.809,1.651 103.858,2.081 103.858,47.081 103.809,47.511 103.668,47.915 103.44,48.277 103.138,48.579 102.776,48.807 102.372,48.948 101.942,48.997 1.942,48.997 1.512,48.948 1.16,48.824 cw(c1.13,48.908) 1.105,48.823 cw(c1.052,48.894) 1.099,48.818 0.771,48.612 cw(c0.69,48.65) 0.753,48.587 0.444,48.277 0.216,47.915 0.075,47.511 0.026,47.081 0.026,2.081

## Silkscreen, mask and mechanical layers (free items; w line width, h text height)
Top Overlay:
  text "4" at 88.519,45.72 h1.02
  text "1" at 46.482,45.466 h1.02
  text "3.3V" at 0.508,27.686 h1.02
  text "1 /  / 0" at 101.727,20.574 h1.02
  text "13" at 45.212,9.779 h1.02
  text "16" at 88.646,9.779 h1.02
  text "Coil Driver Rev A / Kyle R. Designs" at 17.272,5.588 h1.52
Mechanical 1:
  lines w0.25: 1.371,107.816 81.051,107.816 ; 1.396,104.68 81.152,104.68 ; 1.247,58.858 81.178,58.858 81.178,111.553 1.346,111.588 1.247,58.858
  text "Fabrication Notes" at 1.27,115.392 h2.54
  text "June 1, 2018" at 53.111,108.921 h1.52
  text "xxxxx Main Rev A" at 2.971,108.744 h1.52
  text "Ref Sch: xxxx_Rev_A" at 3.152,105.373 h1.52
  text "Workmanship and Quality per IPC-A-600E," at 2.641,101.276 h1.52
  text "IPC-2221, IPC-6012    class 2" at 6.451,98.736 h1.52
  text "Board Thickness: 0.062 inches +/- 10%" at 2.641,96.069 h1.52
  text "2 Layers   FR4" at 2.666,93.681 h1.52
  text "See Stackup for copper thickness." at 2.59,90.887 h1.52
  text "No copper fill" at 2.87,87.738 h1.52
  text "ENIG finish" at 2.743,84.868 h1.52
  text "Solder Mask to be Blue" at 2.59,82.048 h1.52
  text "Legend to be White" at 2.59,79.508 h1.52
  text "No epoxy fill on vias" at 2.59,70.364 h1.52
  text "No clean" at 2.59,67.316 h1.52
  text "RoHS compliant with certification papers" at 2.59,64.268 h1.52
  text "Dimensions in mils." at 2.539,61.068 h1.52

## Text inside footprints (layer, text, board x,y; h text height)
CN18: Top Overlay "D5" at 16.009,32.766 h0.76; Top Overlay "D0" at 16.009,35.306 h0.76; Top Overlay "3V3" at 16.256,23.114 h0.69; Top Overlay "D8" at 16.009,25.146 h0.76; Top Overlay "RST" at 16.009,40.386 h0.69; Top Overlay "A0" at 16.009,37.846 h0.76; Top Overlay "D6" at 16.009,30.226 h0.76; Top Overlay "D7" at 16.009,27.686 h0.76; Top Overlay "D2" at 44.497,32.966 h0.76; Top Overlay "D1" at 44.497,35.506 h0.76; Top Overlay "5V" at 44.497,22.806 h0.69; Top Overlay "RX" at 44.497,38.046 h0.76; Top Overlay "D3" at 44.497,30.426 h0.76; Top Overlay "D4" at 44.497,27.886 h0.76; Top Overlay "GND" at 44.497,25.363 h0.69; Top Overlay "USB" at 29.923,15.363 h0.9; Top Overlay "Antenna" at 28.323,45.063 h0.9; Bottom Overlay "D2" at 43.942,32.258 h0.76 r270; Bottom Overlay "GND" at 46.14,25.346 h0.69; Bottom Overlay "TX" at 46.14,40.586 h0.76; Bottom Overlay "RX" at 46.14,38.046 h0.76; Bottom Overlay "D3" at 46.14,30.426 h0.76; Bottom Overlay "D4" at 46.14,27.886 h0.76; Bottom Overlay "D1" at 43.942,35.306 h0.76 r270; Bottom Overlay "5V" at 46.14,22.806 h0.69; Bottom Overlay "D5" at 17.295,32.866 h0.76; Bottom Overlay "D0" at 17.295,35.406 h0.76; Bottom Overlay "3V3" at 17.858,22.706 h0.69; Bottom Overlay "D8" at 17.295,25.246 h0.76; Bottom Overlay "RST" at 17.858,40.486 h0.69; Bottom Overlay "A0" at 17.295,37.946 h0.76; Bottom Overlay "D6" at 17.295,30.326 h0.76; Bottom Overlay "D7" at 17.295,27.786 h0.76